# Altium PCB SmartSocket V1.0.PcbDoc (part 3 of 4)
Units mm, origin at the board's own origin, x right, y up, seen from the top; angles counter-clockwise.
Board outline 49.2 x 69.88 mm, 2 copper layers (Top Layer, Bottom Layer), stack 1.671 mm thick; 117 components, 80 nets, 371 pads, 48 vias.
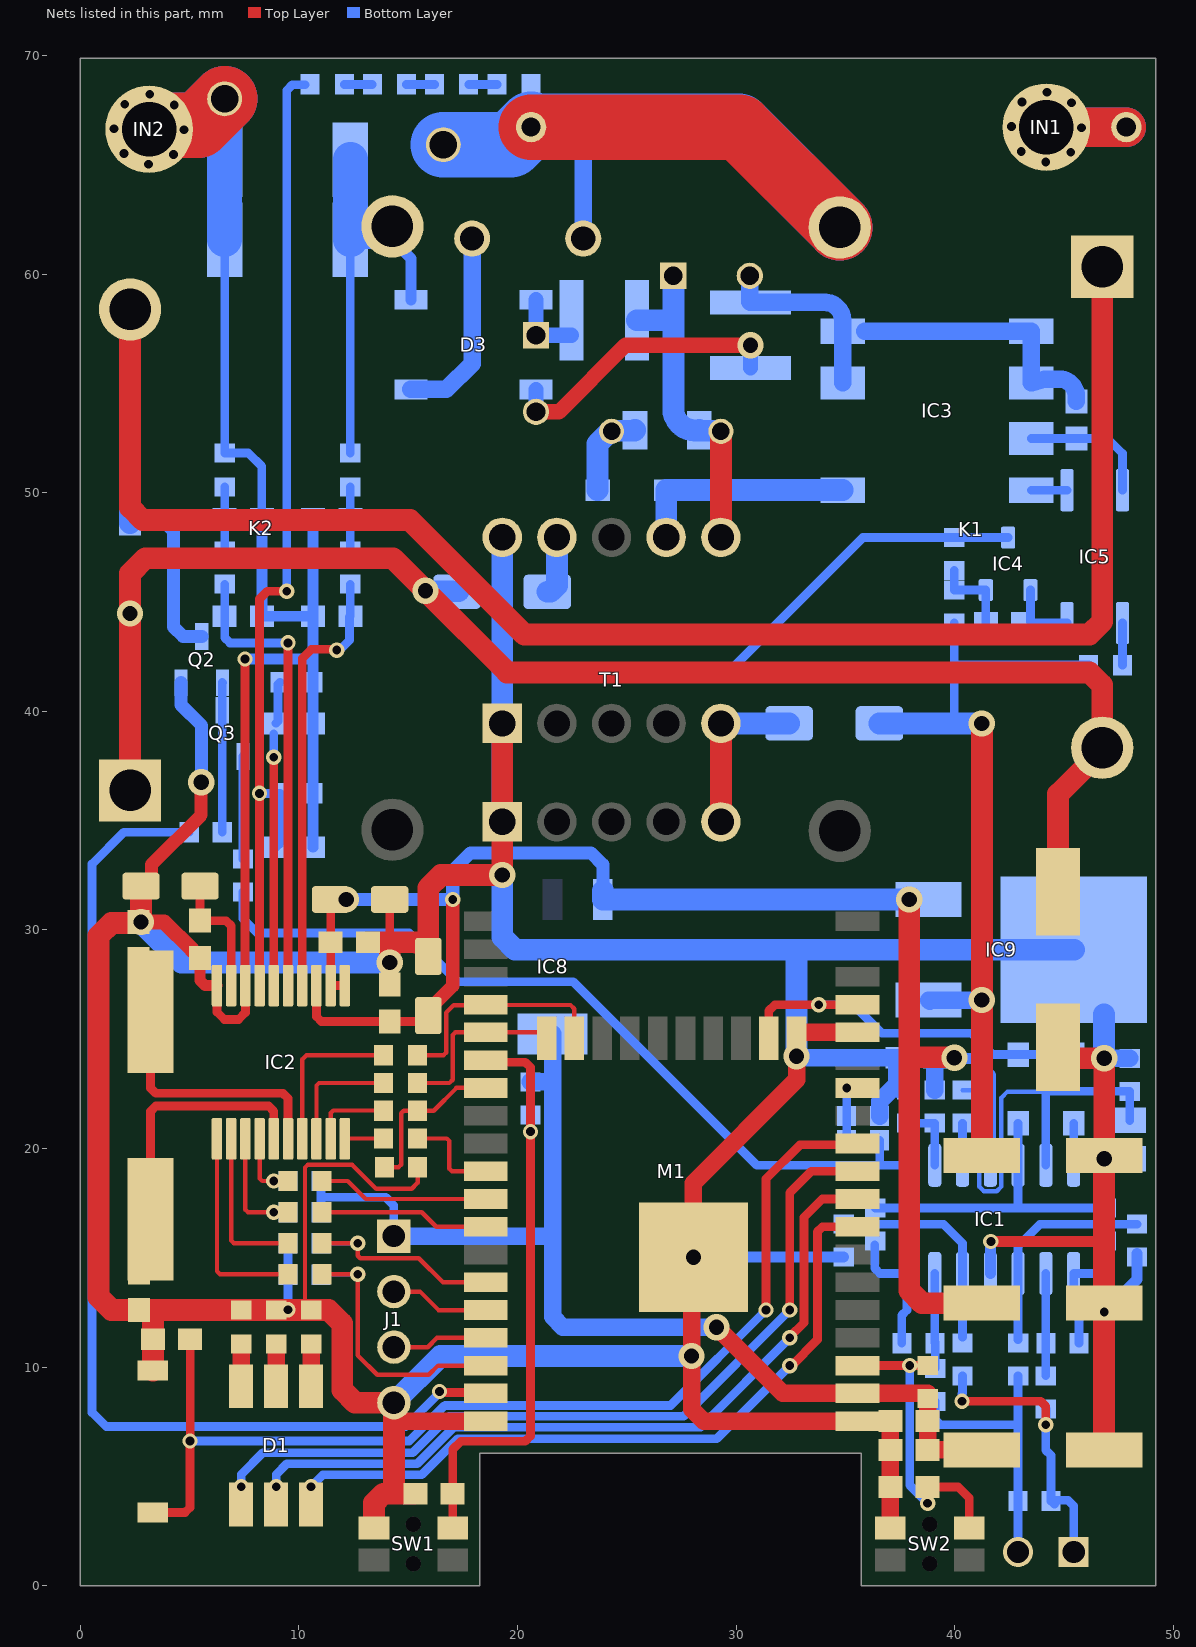
[diagram p2: the nets of this part, all layers, seen from the top]

## Part data (continued)
F2: library part "FUSE; 1A; 36911000000", "Fuse Subminiature Slow Blow Acting 1A 300V Radial 8.5 X 4 X 8mm Ammo Pack", Case/Package=Radial, Current=1A, DC Cold Resistance=71.5mR, Manufacturer="Littelfuse Wickmann", Manufacturer Part Number=36911000000, Max Operating Temperature=85°C, Min Operating Temperature=-40°C, Package Quantity=1400, Supplier Part Number=F5459CT-ND, Voltage Rating (AC)=300V, Blow Characteristic="TIME DELAY", Category=Fuses, ComponentLink1Description=https://datasheet.ciiva.com/7464/littelfuse-fuse-369-series-7464654.pdf?src-supplier=Digikey, ComponentLink1URL=https://datasheet.ciiva.com/7464/littelfuse-fuse-369-series-7464654.pdf?src-supplier=Digikey, ComponentLink2Description=https://datasheet.ciiva.com/16320/littelfuse-fuse-369-16320426.pdf?src-supplier=Future+Electronics, ComponentLink2URL=https://datasheet.ciiva.com/16320/littelfuse-fuse-369-16320426.pdf?src-supplier=Future+Electronics, ComponentLink3Description="Link Digikey", ComponentLink3URL=https://www.digikey.com/en/products/detail/littelfuse-inc/36911000000/1986930, Current Rating=1A, Designer=TVBac, Fuse Current=1A, Fuse Type="Board Mount (Cartridge Style Excluded)", Height=0.315inch, Lead Free="Lead Free", Lead Length=18.8mm, Length=0.335inch, Mounting Technology="Through Hole", Packaging="Cut Tape", Pricing="1=0.58, 5=0.482, 10=0.446, 50=0.3714, 100=0.3433, 250=0.30924, 500=0.28568, 1400=0.25378, 2800=0.23421, 4200=0.22341, 7000=0.218 (USD)", Reach SVHC Compliant=No, RoHS=Yes, RoHS Compliant=Yes, Series="TE5® 369", Size=8mm, Stock=1380, Supplier=Digikey, Termination=Radial, Width=0.157inch, Working Voltage=300V
IC1: library part "OPAM; SMD; LM324DR", "Quad 30-V 1.2-MHz operational amplifier 14-SOIC 0 to 70", Case/Package=SOIC, Input Bias Current=250nA, Input Offset Voltage (Vos)=7mV, Manufacturer="Texas Instruments", Manufacturer Part Number=LM324DR, Max Dual Supply Voltage=16V, Max Operating Temperature=70°C, Max Supply Voltage=32V, Min Dual Supply Voltage=1.5V, Min Operating Temperature=0°C, Min Supply Voltage=3V, Operating Supply Current=1.4mA, Output Current=30mA, Output Current per Channel=40mA, Package Quantity=2500, Supplier Part Number=296-14597-1-ND, Supply Current=3mA, Voltage Gain=100dB, Amplifier Type="GENERAL PURPOSE", Bandwidth=1.2MHz, Category="Amplifiers - Op Amps, Buffer, Instrumentation", Common Mode Rejection Ratio=65dB, ComponentLink1Description=https://datasheet.ciiva.com/34301/902590-34301708.pdf?src-supplier=Jameco, ComponentLink1URL=https://datasheet.ciiva.com/34301/902590-34301708.pdf?src-supplier=Jameco, ComponentLink2Description=https://datasheet.ciiva.com/1795/lm224-1795532.pdf?src-supplier=Digikey, ComponentLink2URL=https://datasheet.ciiva.com/1795/lm224-1795532.pdf?src-supplier=Digikey, ComponentLink3Description=https://datasheet.ciiva.com/1795/lm224-1795533.pdf?src-supplier=Digikey, ComponentLink3URL=https://datasheet.ciiva.com/1795/lm224-1795533.pdf?src-supplier=Digikey, ComponentLink4Description=https://datasheet.ciiva.com/1795/lm224-1795534.pdf?src-supplier=Digikey, ComponentLink4URL=https://datasheet.ciiva.com/1795/lm224-1795534.pdf?src-supplier=Digikey, ComponentLink5Description=https://datasheet.ciiva.com/5997/1768103-5997421.pdf?src-supplier=Farnell, ComponentLink5URL=https://datasheet.ciiva.com/5997/1768103-5997421.pdf?src-supplier=Farnell, ComponentLink6Description=https://datasheet.ciiva.com/2973/lm324ka-2973348.pdf?src-supplier=Avnet, ComponentLink6URL=https://datasheet.ciiva.com/2973/lm324ka-2973348.pdf?src-supplier=Avnet, ComponentLink7Description=https://datasheet.ciiva.com/7709/1840878-7709814.pdf?src-supplier=Element14, ComponentLink7URL=https://datasheet.ciiva.com/7709/1840878-7709814.pdf?src-supplier=Element14, ComponentLink8Description=https://datasheet.ciiva.com/46385/1877076-46385751.pdf?src-supplier=Element14, ComponentLink8URL=https://datasheet.ciiva.com/46385/1877076-46385751.pdf?src-supplier=Element14, ComponentLink9Description="Link Digikey", ComponentLink9URL=https://www.digikey.kr/en/products/detail/texas-instruments/LM324DR/555719, Designer=TVBac, Gain Bandwidth Product=1.2MHz, Lead Free="Lead Free", Mounting Technology="Surface Mount", Number of Amplifiers=4, Number of Channels=4, Number of Circuits=4, Number of Elements=4, Operating Supply Voltage=16V, Packaging="Tape and Reel", Pins=14, Pricing="1=0.23, 10=0.152, 25=0.132, 100=0.1105, 250=0.10008, 500=0.09382, 1000=0.08867, 2500=0.08322, 5000=0.07994, 7500=0.0783, 12500=0.07647, 17500=0.07541, 25000=0.07438, 62500=0.07218, 125000=0.07085 (USD)", Radiation Hardening=No, Reach SVHC Compliant=No, RoHS=Yes, RoHS Compliant=Yes, Series=-, Slew Rate=0.5V/µs, Stock=58799, Supplier=Digikey, Technology=BIPOLAR, Thickness=1.58mm, Unity Gain Bandwidth Product=1.2MHz
IC2: library part ADE7753ARSZ, "Single Phase Multifunction Metering IC 20-Pin SSOP Tube", Manufacturer="Analog Devices", Supplier Part Number=584-ADE7753ARSZ, Category="Analog to Digital Converters (ADCs)", ComponentLink1Description=https://datasheet.ciiva.com/15373/ade7753-249340-15373717.pdf?src-supplier=Mouser, ComponentLink1URL=https://datasheet.ciiva.com/15373/ade7753-249340-15373717.pdf?src-supplier=Mouser, ComponentLink2Description=https://datasheet.ciiva.com/1166/1610806-1166771.pdf?src-supplier=Element14, ComponentLink2URL=https://datasheet.ciiva.com/1166/1610806-1166771.pdf?src-supplier=Element14, ComponentLink3Description=https://datasheet.ciiva.com/15134/getdatasheetpartid-132040-15134272.pdf?src-supplier=Verical, ComponentLink3URL=https://datasheet.ciiva.com/15134/getdatasheetpartid-132040-15134272.pdf?src-supplier=Verical, ComponentLink4Description=https://datasheet.ciiva.com/1941/ade7753-1941429.pdf?src-supplier=Digikey, ComponentLink4URL=https://datasheet.ciiva.com/1941/ade7753-1941429.pdf?src-supplier=Digikey, ComponentLink5Description=https://datasheet.ciiva.com/22621/1610806-22621637.pdf?src-supplier=Element14, ComponentLink5URL=https://datasheet.ciiva.com/22621/1610806-22621637.pdf?src-supplier=Element14, ComponentLink6Description=https://datasheet.ciiva.com/3148/ade7753-3148700.pdf?src-supplier=Avnet, ComponentLink6URL=https://datasheet.ciiva.com/3148/ade7753-3148700.pdf?src-supplier=Avnet, ComponentLink7Description=https://datasheet.ciiva.com/1168/1610806-1168083.pdf?src-supplier=Element14, ComponentLink7URL=https://datasheet.ciiva.com/1168/1610806-1168083.pdf?src-supplier=Element14, ComponentLink8Description=https://datasheet.ciiva.com/5697/ade7753-5697029.pdf?src-supplier=Farnell, ComponentLink8URL=https://datasheet.ciiva.com/5697/ade7753-5697029.pdf?src-supplier=Farnell, ComponentLink9Description=https://datasheet.ciiva.com/48694/001249930-da-01-en-ic-energy-meteri-ade7753arsz-ssop-20-adi-48694326.pdf?src-supplier=Conrad, ComponentLink9URL=https://datasheet.ciiva.com/48694/001249930-da-01-en-ic-energy-meteri-ade7753arsz-ssop-20-adi-48694326.pdf?src-supplier=Conrad, ComponentLink10Description="Link Digikey", ComponentLink10URL=https://www.digikey.com/en/products/detail/analog-devices-inc/ADE7753ARSZ/671181, Designer=TVBac, Manufacturer Part Number=ADE7753ARSZ, Pricing="1=7.3, 10=5.71, 50=5.04, 100=3.91, 1000=3.51, 10000=3.37 (USD)", RoHS=Yes, Stock=239, Supplier=Mouser
IC3: library part LNK364GN-TL, "AC to DC Switching Converter Off-Line Switcher 140kHz 7-Pin SMD-B / IC OFFLINE SWIT HV 8SMD", Manufacturer="Power Integrations", Supplier Part Number=596-1089-1-ND, Category="Voltage Regulators - Switching", ComponentLink1Description=https://datasheet.ciiva.com/1930/lnk362-364-1930587.pdf?src-supplier=Digikey, ComponentLink1URL=https://datasheet.ciiva.com/1930/lnk362-364-1930587.pdf?src-supplier=Digikey, ComponentLink2Description=https://datasheet.ciiva.com/1930/lnk362-364-1930588.pdf?src-supplier=Digikey, ComponentLink2URL=https://datasheet.ciiva.com/1930/lnk362-364-1930588.pdf?src-supplier=Digikey, ComponentLink3Description=https://datasheet.ciiva.com/1930/lnk362-364-1930589.pdf?src-supplier=Digikey, ComponentLink3URL=https://datasheet.ciiva.com/1930/lnk362-364-1930589.pdf?src-supplier=Digikey, ComponentLink4Description=https://datasheet.ciiva.com/12230/lnk362-364-3310-12230262.pdf?src-supplier=Mouser, ComponentLink4URL=https://datasheet.ciiva.com/12230/lnk362-364-3310-12230262.pdf?src-supplier=Mouser, ComponentLink5Description="Link Digikey", ComponentLink5URL=https://www.digikey.com/en/products/detail/power-integrations/LNK364GN-TL/1007182, Designer=TVBac, Manufacturer Part Number=LNK364GN-TL, Pricing="1=0.87, 100=0.7168 (USD)", RoHS=Yes, Stock=726, Supplier=Digikey
IC4: library part TL431AIDBZR, "V-Ref Adjustable 2.495V to 36V 100mA Automotive 3-Pin SOT-23 T/R", Case/Package=SOT-23, Cathode Current=700uA, Manufacturer="Texas Instruments", Max Operating Temperature=125°C, Max Output current=100mA, Max Output Voltage=36V, Max Supply Voltage=37V, Min Input Voltage=2.495V, Min Operating Temperature=-40°C, Package Quantity=1, Supplier Part Number=595-TL431AIDBZR, Temperature Coefficient=92ppm/°C, Tolerance=1%, Category="Voltage References", ComponentLink1Description=https://datasheet.ciiva.com/3235/tl432b-3235600.pdf?src-supplier=Avnet, ComponentLink1URL=https://datasheet.ciiva.com/3235/tl432b-3235600.pdf?src-supplier=Avnet, ComponentLink2Description=https://datasheet.ciiva.com/15148/getdatasheetpartid-171576-15148968.pdf?src-supplier=Verical, ComponentLink2URL=https://datasheet.ciiva.com/15148/getdatasheetpartid-171576-15148968.pdf?src-supplier=Verical, ComponentLink3Description=https://datasheet.ciiva.com/41462/001014548-da-01-en-ic-vref-shunt-prec-tl431aidbzr-sot-3-tid-41462400.pdf?src-supplier=Conrad, ComponentLink3URL=https://datasheet.ciiva.com/41462/001014548-da-01-en-ic-vref-shunt-prec-tl431aidbzr-sot-3-tid-41462400.pdf?src-supplier=Conrad, ComponentLink4Description=https://datasheet.ciiva.com/46397/1887475-46397705.pdf?src-supplier=Element14, ComponentLink4URL=https://datasheet.ciiva.com/46397/1887475-46397705.pdf?src-supplier=Element14, ComponentLink5Description=https://datasheet.ciiva.com/2006/tl431a-2006188.pdf?src-supplier=Digikey, ComponentLink5URL=https://datasheet.ciiva.com/2006/tl431a-2006188.pdf?src-supplier=Digikey, ComponentLink6Description=https://datasheet.ciiva.com/2006/tl431a-2006187.pdf?src-supplier=Digikey, ComponentLink6URL=https://datasheet.ciiva.com/2006/tl431a-2006187.pdf?src-supplier=Digikey, ComponentLink7Description=https://datasheet.ciiva.com/2006/tl431a-2006189.pdf?src-supplier=Digikey, ComponentLink7URL=https://datasheet.ciiva.com/2006/tl431a-2006189.pdf?src-supplier=Digikey, ComponentLink8Description="Link Digikey", ComponentLink8URL=https://www.digikey.com/en/products/detail/texas-instruments/TL431AIDBZR/686856, Designer=TVBac, Lead Free="Lead Free", Manufacturer Part Number=TL431AIDBZR, Min Output Voltage=2.495V, Number of Channels=1, Output Current=100mA, Output Type=Adjustable, Output Voltage=36V, Packaging="Tape and Reel", Pins=3, Pricing="1=0.25, 10=0.142, 50=0.142, 100=0.101, 1000=0.095, 10000=0.08 (USD)", Radiation Hardening=No, Reach SVHC Compliant=No, Reference Type=Shunt,Adjustable, Reference Voltage=36V, RoHS=Yes, RoHS Compliant=Yes, Series=-, Stock=734349, Supplier=Mouser
IC5: library part "ISO; 1CH; EL357N-G", "Transistor Output Optocoupler, 1-Element, 3750V Isolation", Manufacturer=Everlight, Manufacturer Part Number=EL357N-G, Supplier Part Number=1080-1037-ND, Category=Optocouplers, ComponentLink1Description=https://datasheet.ciiva.com/2086/201407061738295695-2086633.pdf?src-supplier=Digikey, ComponentLink1URL=https://datasheet.ciiva.com/2086/201407061738295695-2086633.pdf?src-supplier=Digikey, Pricing="1=0.7, 10=0.416, 100=0.2729, 500=0.2168, 1000=0.19958, 2000=0.18548, 5000=0.17066, 10000=0.16177, 25000=0.15242 (USD)", RoHS=Yes, Stock=137, Supplier=Digikey
IC8: library part "LDO; 3V3; 1A; SMD; AZ1117EH-3.3TRG1", "Linear Voltage Regulator IC 1 Output 1A SOT-223", Package="SOT-223 Diodes Inc.", Availability=Unavailable, ComponentLink1Description="Link Digikey", ComponentLink1URL=https://www.digikey.com/en/products/detail/diodes-incorporated/AZ1117EH-3-3TRG1/5001329, Designer=TVBac, MF="Diodes Inc.", MP=AZ1117EH-3.3TRG1, Price=None, SnapEDA_Link=https://www.snapeda.com/parts/AZ1117EH-3.3TRG1/Diodes%20Inc./view-part/482930/?ref=snap
IC9: library part "LDO; 5V; 1A; BA17805FP-E2", "Linear Voltage Regulator, Fixed, Positive Output, 7.5 V to 25 V, 5V, 1A, 3 Pins, TO-252 (DPAK)", Manufacturer=Rohm, Manufacturer Part Number=BA17805FP-E2, Supplier Part Number=755-BA17805FP-E2, Category="Voltage Regulators - Linear", ComponentLink1Description=https://datasheet.ciiva.com/23912/1747296-23912291.pdf?src-supplier=Newark, ComponentLink1URL=https://datasheet.ciiva.com/23912/1747296-23912291.pdf?src-supplier=Newark, ComponentLink2Description=https://datasheet.ciiva.com/26878/getdatasheetpartid-477305-26878653.pdf?src-supplier=Verical, ComponentLink2URL=https://datasheet.ciiva.com/26878/getdatasheetpartid-477305-26878653.pdf?src-supplier=Verical, ComponentLink3Description=https://datasheet.ciiva.com/22732/1747296-22732780.pdf?src-supplier=Element14, ComponentLink3URL=https://datasheet.ciiva.com/22732/1747296-22732780.pdf?src-supplier=Element14, ComponentLink4Description=https://datasheet.ciiva.com/6594/ba178-series-j-6594060.pdf?src-supplier=Digikey, ComponentLink4URL=https://datasheet.ciiva.com/6594/ba178-series-j-6594060.pdf?src-supplier=Digikey, ComponentLink5Description=https://datasheet.ciiva.com/6594/ba178-series-j-6594061.pdf?src-supplier=Digikey, ComponentLink5URL=https://datasheet.ciiva.com/6594/ba178-series-j-6594061.pdf?src-supplier=Digikey, ComponentLink6Description=https://datasheet.ciiva.com/6594/ba178-series-j-6594062.pdf?src-supplier=Digikey, ComponentLink6URL=https://datasheet.ciiva.com/6594/ba178-series-j-6594062.pdf?src-supplier=Digikey, ComponentLink7Description="Link Digikey", ComponentLink7URL=https://www.digikey.com/en/products/detail/rohm-semiconductor/BA17805FP-E2/658261, Designer=TVBac, Lead Free=5697LeadFree, Number of Channels=1NUMBER, Pricing="1=0.82, 10=0.599, 50=0.599, 100=0.411, 1000=0.336, 10000=0.251 (USD)", RoHS=Yes, Stock=4846, Supplier=Mouser, Watchdog Timer=5511WatchdogTimer
IN1 IN2: library part INPUT-2.0x3.5, Designer=TVBac
J1: library part "HEADER; 4PIN; 2.54; VER; TSW-104-14-L-S", "Conn Unshrouded Header HDR 4 POS 2.54mm Solder ST Thru-Hole Automotive Bulk", Manufacturer=Samtec, Manufacturer Part Number=TSW-104-14-L-S, Supplier Part Number=SAM1055-04-ND, Category=Connectors, ComponentLink1Description=https://datasheet.ciiva.com/25618/0900766b81154476-25618487.pdf?src-supplier=Rs, ComponentLink1URL=https://datasheet.ciiva.com/25618/0900766b81154476-25618487.pdf?src-supplier=Rs, ComponentLink2Description=https://datasheet.ciiva.com/10190/htsw-th-10190703.pdf?src-supplier=Avnet, ComponentLink2URL=https://datasheet.ciiva.com/10190/htsw-th-10190703.pdf?src-supplier=Avnet, ComponentLink3Description="Link Digikey", ComponentLink3URL=https://www.digikey.com/en/products/detail/samtec-inc/TSW-104-14-L-S/1102620, Designer=TVBac, Pricing="1=0.43, 10=0.377, 100=0.3107, 500=0.2702, 1000=0.22291, 5000=0.19589, 10000=0.18238 (USD)", RoHS=Yes, Stock=1246, Supplier=Digikey
J6: library part "HEADER; 2PIN; 2.54; VER; TSW-101-15-T-D", "Headers & Wire Housings Classic PCB Header Strips, 0.100 pitch", Manufacturer=Samtec, Manufacturer Part Number=TSW-101-15-T-D, Category=Connectors, ComponentLink1Description=https://datasheet.ciiva.com/10283/htsw-th-10283318.pdf?src-supplier=Avnet, ComponentLink1URL=https://datasheet.ciiva.com/10283/htsw-th-10283318.pdf?src-supplier=Avnet, ComponentLink2Description="Link Digikey", ComponentLink2URL=https://www.digikey.com/en/products/detail/samtec-inc/TSW-101-15-T-D/7861723, Designer=TVBac, Pricing="1=0.18, 50=0.14, 100=0.12, 500=0.1, 1000=0.07, 2000=0.06, 5000=0.05 (USD)", RoHS=Yes, Stock=4464, Supplier="Arrow Electronics", Supplier Part Number=TSW-101-15-T-D
K1 K2: library part "RELAY; SINGLE; 20A; 12VDC; G4A-1A-E-DC12", "Electromechanical Relay 12VDC 160Ohm 20A SPST-NO (30.5x16x33.5)mm THT Power Relay", Manufacturer=Omron, Manufacturer Part Number=G4A-1A-E-DC12, Supplier Part Number="G4A-1A-E DC12", Category="Power Relays", ComponentLink1Description=https://datasheet.ciiva.com/22829/0900766b8002b917-22829163.pdf?src-supplier=Rs, ComponentLink1URL=https://datasheet.ciiva.com/22829/0900766b8002b917-22829163.pdf?src-supplier=Rs, ComponentLink2Description="Link Digikey", ComponentLink2URL=https://www.digikey.com/en/products/detail/omron-electronics-inc-emc-div/G4A-1A-E-DC12/202598, Designer=TVBac, Pricing="19=4.336 (USD)", RoHS=Yes, Stock=19, Supplier="Arrow Electronics"
L1 L2: library part "IND; 220uH; 250mA; ASPI-0418FS-221M-T3", "Power Inductor (SMD), 220 uH, ± 20%, 250 mA, Shielded, 330 mA, 4mm x 4mm x 1.8mm", Manufacturer=Abracon, Manufacturer Part Number=ASPI-0418FS-221M-T3, Supplier Part Number=815-ASPI0418FS221MT3, Category="Fixed Inductors", ComponentLink1Description=https://abracon.com/Magnetics/new/ASPI-0418FS.pdf?src-supplier=Digikey, ComponentLink1URL=https://abracon.com/Magnetics/new/ASPI-0418FS.pdf?src-supplier=Digikey, ComponentLink2Description="Link Digikey", ComponentLink2URL=https://www.digikey.com/en/products/detail/abracon-llc/ASPI-0418FS-221M-T3/10273501, Designer=TVBac, Pricing="1=0.36, 10=0.234, 50=0.234, 100=0.182, 1000=0.163, 10000=0.127 (USD)", RoHS=No, Stock=2874, Supplier=Mouser
M1: library part "ESP32-WROOM-WROVE-32E-H4; SMD;", "Rf Txrx Module Bt Trace Ant SMD", Manufacturer="Espressif Systems", Manufacturer Part Number=ESP32-WROOM-32E-H4, Supplier Part Number=1965-ESP32-WROOM-32E-H4CT-ND, Category=LDO, ComponentLink1Description="Link Datasheet", ComponentLink1URL=https://www.espressif.com/sites/default/files/documentation/esp32-wroom-32e_esp32-wroom-32ue_datasheet_en.pdf, ComponentLink2Description="Link Digikey", ComponentLink2URL=https://www.digikey.com/en/products/detail/espressif-systems/ESP32-WROOM-32E-H4/12696413, Designer=TVBac, Pricing="1=2.68 (USD)", RoHS=No, Stock=7552, Supplier=Digikey
Q2 Q3: library part "TRAN; NPN; 500mA;V;  BC817-25LT1G", "Single Bipolar Transistor, NPN, 45 V, 500 mA, 225 mW, SOT-23 (TO-236), 3 Pins, Surface Mount", Case/Package=SOT-23-3, Clock Frequency=100MHz, Collector Base Voltage (VCBO)=50V, Collector Emitter Breakdown Voltage=45V, Collector Emitter Saturation Voltage=700mV, Current Rating=500mA, Emitter Base Voltage (VEBO)=5V, Manufacturer="ON Semiconductor", Manufacturer Part Number=BC817-25LT1G, Max Operating Temperature=150°C, Max Power Dissipation=300mW, Min Operating Temperature=-55°C, Package Quantity=3000, Supplier Part Number=8062284, Category=BJTs, Collector Emitter Voltage (VCEO)=45V, Collector-emitter Voltage-Max=700mV, ComponentLink1Description=https://datasheet.ciiva.com/27748/2010413-27748829.pdf?src-supplier=Jameco, ComponentLink1URL=https://datasheet.ciiva.com/27748/2010413-27748829.pdf?src-supplier=Jameco, ComponentLink2Description=https://datasheet.ciiva.com/1196/bc817-16lt1-d-1196558.pdf?src-supplier=Element14, ComponentLink2URL=https://datasheet.ciiva.com/1196/bc817-16lt1-d-1196558.pdf?src-supplier=Element14, ComponentLink3Description=https://datasheet.ciiva.com/22641/bc817-16lt1-d-22641013.pdf?src-supplier=Farnell, ComponentLink3URL=https://datasheet.ciiva.com/22641/bc817-16lt1-d-22641013.pdf?src-supplier=Farnell, ComponentLink4Description=https://datasheet.ciiva.com/22664/bc817-16lt1-d-22664204.pdf?src-supplier=Element14, ComponentLink4URL=https://datasheet.ciiva.com/22664/bc817-16lt1-d-22664204.pdf?src-supplier=Element14, ComponentLink5Description=https://datasheet.ciiva.com/22664/1842041-22664101.pdf?src-supplier=Element14, ComponentLink5URL=https://datasheet.ciiva.com/22664/1842041-22664101.pdf?src-supplier=Element14, ComponentLink6Description="Link Digikey", ComponentLink6URL=https://www.digikey.com/en/products/detail/onsemi/BC817-25LT1G/918339, Contact Plating=Tin,Matte, Designer=TVBac, Frequency=100MHz, Gain Bandwidth Product=100MHz, Height=0.94mm, hFE Min=160, Lead Free="Lead Free", Length=2.9mm, Max Breakdown Voltage=45V, Max Collector Current=500mA, Number of Elements=1, Packaging="Tape and Reel", Pins=3, Polarity=NPN, Power Dissipation=300mW, Pricing="3000=0.0157, 12000=0.0151, 30000=0.0146, 75000=0.0142, 120000=0.0136 (USD)", Radiation Hardening=No, Reach SVHC Compliant=No, RoHS=Yes, RoHS Compliant=Yes, Series=-, Stock=1185000, Supplier="Future Electronics", Transition Frequency=100MHz, Width=1.3mm
R1 R3 R8 R20 R23 R24 R25 R28 R29 R39: library part "RES; 10K; 0603; SMD; ESR03EZPF1002", "SMD Chip Resistor, 10 kOhm, ± 1%, 250 mW, 0603 [1608 Metric], Thick Film, Anti-Surge", Case Code (Imperial)=0603, Case Code (Metric)=1608, Manufacturer=Rohm, Manufacturer Part Number=ESR03EZPF1002, Max Operating Temperature=155°C, Max Power Dissipation=250mW, Min Operating Temperature=-55°C, Package Quantity=1, Ratings=AEC-Q200, Supplier Part Number=RHM10KADCT-ND, Temperature Coefficient=100ppm/°C, Tolerance=1%, Voltage Rating (DC)=150V, Case/Package=0603, Category="Chip SMD Resistors", ComponentLink1Description=https://datasheet.ciiva.com/2469/esr-2469710.pdf?src-supplier=Digikey, ComponentLink1URL=https://datasheet.ciiva.com/2469/esr-2469710.pdf?src-supplier=Digikey, ComponentLink2Description=https://datasheet.ciiva.com/2469/esr-2469711.pdf?src-supplier=Digikey, ComponentLink2URL=https://datasheet.ciiva.com/2469/esr-2469711.pdf?src-supplier=Digikey, ComponentLink3Description=https://datasheet.ciiva.com/2469/esr-2469709.pdf?src-supplier=Digikey, ComponentLink3URL=https://datasheet.ciiva.com/2469/esr-2469709.pdf?src-supplier=Digikey, ComponentLink4Description="Link Digikey", ComponentLink4URL=https://www.digikey.com/en/products/detail/rohm-semiconductor/ESR03EZPF1002/1983429, Designer=TVBac, Features="Automotive AEC-Q200", Height=0.022inch, Lead Free=5697LeadFree, Length=0.063inch, Number of Terminations=2, Packaging="Cut Tape", Power Rating=250mW, Pricing="1=0.16, 10=0.078, 50=0.0516, 100=0.044, 500=0.03138, 1000=0.02764 (USD)", RoHS=Yes, RoHS Compliant=Yes, Series=ESR, Stock=2136779, Supplier=Digikey, Width=0.031inch
R4 R5 R6 R9 R11 R19 R21 R22 R27 R31 R32: library part "RES; 100R; 0603; SMD; KTR03EZPF1000", "Res Thick Film 0603 100 Ohm 1% 0.1W(1/10W) ±100ppm/C Pad SMD T/R Automotive AEC-Q200", Case Code (Imperial)=0603, Case Code (Metric)=1608, Manufacturer=Rohm, Manufacturer Part Number=KTR03EZPF1000, Max Operating Temperature=155°C, Max Power Dissipation=100mW, Min Operating Temperature=-55°C, Ratings=AEC-Q200, Supplier Part Number=755-KTR03EZPF1000, Temperature Coefficient=100ppm/°C, Tolerance=1%, Voltage Rating=350V, Case/Package=0603, Category="Chip SMD Resistors", ComponentLink1Description=https://datasheet.ciiva.com/14926/ktr-14926472.pdf?src-supplier=Digikey, ComponentLink1URL=https://datasheet.ciiva.com/14926/ktr-14926472.pdf?src-supplier=Digikey, ComponentLink2Description=https://datasheet.ciiva.com/14932/ktr-14932133.pdf?src-supplier=Digikey, ComponentLink2URL=https://datasheet.ciiva.com/14932/ktr-14932133.pdf?src-supplier=Digikey, ComponentLink3Description="Link Digikey", ComponentLink3URL=https://www.digikey.com/en/products/detail/rohm-semiconductor/KTR03EZPF1000/4051558, Designer=TVBac, Features="Automotive AEC-Q200", Number of Terminations=2, Packaging="Cut Tape", Pricing="1=0.12, 10=0.039, 50=0.039, 100=0.024, 1000=0.021, 10000=0.015 (USD)", RoHS=Yes, RoHS Compliant=Yes, Series=KTR, Stock=66325, Supplier=Mouser, Voltage Rating (DC)=350V
R7 R57: library part "RES; SHUNT; 10mOhm; SMD; WFMA2512R0100FEA", "Res Current Sense Metal Plate 2512 0.01 Ohm 1% 3W ±110ppm/°C Molded T/R", Manufacturer=Vishay, Manufacturer Part Number=WFMA2512R0100FEA, Power Rating=3W, Supplier Part Number=541-10292-6-ND, Temperature Coefficient=110ppm/°C, Category="Chip SMD Resistors", ComponentLink1Description=http://www.vishay.com/docs/30387/wfm.pdf?src-supplier=Digikey, ComponentLink1URL=http://www.vishay.com/docs/30387/wfm.pdf?src-supplier=Digikey, ComponentLink2Description=http://www.farnell.com/datasheets/2793367.pdf?src-supplier=Newark, ComponentLink2URL=http://www.farnell.com/datasheets/2793367.pdf?src-supplier=Newark, ComponentLink3Description="Link Digikey", ComponentLink3URL=https://www.digikey.com/en/products/detail/vishay-dale/WFMA2512R0100FEA/9992531, ComponentLink4Description="Link CXT", ComponentLink4URL=https://linhkien.cxt.vn/3121-wfma2512r0100fea-tro-001-ohms-1-3w.html, Designer=TVBac, Pricing="1=2.85, 10=1.682, 25=1.3844, 50=1.2026, 100=1.0506, 250=0.88712, 500=0.78654, 1000=0.70625 (USD)", RoHS=Yes, Supplier=Digikey
R10 R12 R13 R17 R35 R37 R38 R40 R42 R43 R46 R47 R49 R54 R55 R56 R58: library part "RES; 1K; 0603; SMD; ESR03EZPF1001", "SMD Chip Resistor, 1 kOhm, ± 1%, 250 mW, 0603 [1608 Metric], Thick Film, Anti-Surge", Manufacturer=Rohm, Manufacturer Part Number=ESR03EZPF1001, Supplier Part Number=RHM1.00KADCT-ND, Voltage Rating=150V, Category="Chip SMD Resistors", ComponentLink1Description=https://datasheet.ciiva.com/2469/esr-2469712.pdf?src-supplier=Digikey, ComponentLink1URL=https://datasheet.ciiva.com/2469/esr-2469712.pdf?src-supplier=Digikey, ComponentLink2Description=https://datasheet.ciiva.com/2469/esr-2469713.pdf?src-supplier=Digikey, ComponentLink2URL=https://datasheet.ciiva.com/2469/esr-2469713.pdf?src-supplier=Digikey, ComponentLink3Description=https://datasheet.ciiva.com/2469/esr-2469714.pdf?src-supplier=Digikey, ComponentLink3URL=https://datasheet.ciiva.com/2469/esr-2469714.pdf?src-supplier=Digikey, ComponentLink4Description="Link Digikey", ComponentLink4URL=https://www.digikey.com/en/products/detail/rohm-semiconductor/ESR03EZPF1001/1983428, Designer=TVBac, Lead Free=5697LeadFree, Pricing="1=0.11, 10=0.055, 50=0.0364, 100=0.0309, 500=0.02206, 1000=0.01943 (USD)", RoHS=Yes, Stock=2703233, Supplier=Digikey, Voltage Rating (DC)=150V
R14 R15 R16 R18: library part "RES; 300K; 0603; SMD; KTR03EZPF3003", "Res High Voltage Thick Film 0603 300k Ohm 1% 1/10W ±100ppm/°C Molded Paper T/R", Case Code (Imperial)=0603, Case Code (Metric)=1608, Manufacturer=Rohm, Manufacturer Part Number=KTR03EZPF3003, Max Operating Temperature=155°C, Max Power Dissipation=100mW, Min Operating Temperature=-55°C, Package Quantity=5000, Supplier Part Number=755-KTR03EZPF3003, Temperature Coefficient=100ppm/°C, Tolerance=1%, Voltage Rating=350V, Case/Package=0603, Category="Chip SMD Resistors", ComponentLink1Description=https://datasheet.ciiva.com/14926/ktr-14926439.pdf?src-supplier=Digikey, ComponentLink1URL=https://datasheet.ciiva.com/14926/ktr-14926439.pdf?src-supplier=Digikey, ComponentLink2Description=https://datasheet.ciiva.com/14925/ktr-14925709.pdf?src-supplier=Digikey, ComponentLink2URL=https://datasheet.ciiva.com/14925/ktr-14925709.pdf?src-supplier=Digikey, ComponentLink3Description="Link Digikey", ComponentLink3URL=https://www.digikey.com/en/products/detail/rohm-semiconductor/KTR03EZPF3003/4051625, Designer=TVBac, Features="Automotive AEC-Q200", Height=0.022inch, Length=0.063inch, Number of Terminations=2, Packaging="Cut Tape", Pricing="1=0.17, 10=0.055, 50=0.055, 100=0.032, 1000=0.026, 10000=0.019 (USD)", RoHS=Yes, RoHS Compliant=Yes, Series=KTR, Stock=9502, Supplier=Mouser, Voltage Rating (DC)=350V, Width=0.031inch
R26 R33 R34: library part "RES; 4.7K; 0603; SMD; SFR03EZPF4701", "Res Anti-Sulfured Thick Film 0603 4.7k Ohm 1% 1/10W ±100ppm/°C Molded Paper T/R", Manufacturer=Rohm, Manufacturer Part Number=SFR03EZPF4701, Power Rating=100mW, Supplier Part Number=755-SFR03EZPF4701, Voltage Rating (DC)=50V, Category="Chip SMD Resistors", ComponentLink1Description=http://www.farnell.com/datasheets/2611943.pdf?src-supplier=Farnell, ComponentLink1URL=http://www.farnell.com/datasheets/2611943.pdf?src-supplier=Farnell, ComponentLink2Description=http://www.farnell.com/datasheets/2611943.pdf?src-supplier=Newark, ComponentLink2URL=http://www.farnell.com/datasheets/2611943.pdf?src-supplier=Newark, ComponentLink3Description=http://www.farnell.com/datasheets/2611943.pdf?src-supplier=Element14, ComponentLink3URL=http://www.farnell.com/datasheets/2611943.pdf?src-supplier=Element14, ComponentLink4Description=https://www.rohm.com/datasheet/SFR03EZPF/sfr-e?src-supplier=Digikey, ComponentLink4URL=https://www.rohm.com/datasheet/SFR03EZPF/sfr-e?src-supplier=Digikey, ComponentLink5Description="Link Digikey", ComponentLink5URL=https://www.digikey.com/en/products/detail/rohm-semiconductor/SFR03EZPF4701/9771855, Designer=TVBac, Pricing="1=0.14, 10=0.045, 50=0.045, 100=0.027, 1000=0.02, 10000=0.014 (USD)", RoHS=Yes, Stock=30180, Supplier=Mouser
R30: library part "RES; 300K; 1206; ESR18EZPF3003", "Res Thick Film 1206 300K Ohm 1% 0.5W(1/2W) ±100ppm/C Epoxy Resin Pad SMD Automotive T/R", Case Code (Imperial)=1206, Case Code (Metric)=3216, Manufacturer=Rohm, Manufacturer Part Number=ESR18EZPF3003, Max Operating Temperature=155°C, Max Power Dissipation=500mW, Min Operating Temperature=-55°C, Ratings=AEC-Q200, Supplier Part Number=755-ESR18EZPF3003, Temperature Coefficient=100ppm/°C, Tolerance=1%, Voltage Rating=200V, Case/Package=1206, Category="Chip SMD Resistors", ComponentLink1Description=https://datasheet.ciiva.com/2527/esr-2527195.pdf?src-supplier=Digikey, ComponentLink1URL=https://datasheet.ciiva.com/2527/esr-2527195.pdf?src-supplier=Digikey, ComponentLink2Description=https://datasheet.ciiva.com/2527/esr-2527196.pdf?src-supplier=Digikey, ComponentLink2URL=https://datasheet.ciiva.com/2527/esr-2527196.pdf?src-supplier=Digikey, ComponentLink3Description=https://datasheet.ciiva.com/2527/esr-2527197.pdf?src-supplier=Digikey, ComponentLink3URL=https://datasheet.ciiva.com/2527/esr-2527197.pdf?src-supplier=Digikey, ComponentLink4Description="Link Digikey", ComponentLink4URL=https://www.digikey.com/en/products/detail/rohm-semiconductor/ESR18EZPF3003/1983605, Designer=TVBac, Features="Automotive AEC-Q200", Number of Terminations=2, Packaging="Cut Tape", Pricing="1=0.12, 10=0.042, 50=0.042, 100=0.026, 1000=0.023, 10000=0.016 (USD)", RoHS=Yes, RoHS Compliant=Yes, Series=ESR, Stock=34367, Supplier=Mouser
R36 R41 R44 R45 R48: library part "RES; 100K; 0603; SMD; ESR03EZPJ104", "Res Thick Film 0603 100K Ohm 5% 0.25W(1/4W) ±200ppm/C Pad SMD Automotive T/R", Manufacturer=Rohm, Manufacturer Part Number=ESR03EZPJ104, Supplier Part Number=RHM100KDCT-ND, Voltage Rating=150V, Category="Chip SMD Resistors", ComponentLink1Description=https://datasheet.ciiva.com/14924/esr-14924811.pdf?src-supplier=Digikey, ComponentLink1URL=https://datasheet.ciiva.com/14924/esr-14924811.pdf?src-supplier=Digikey, ComponentLink2Description=https://datasheet.ciiva.com/14928/esr-14928813.pdf?src-supplier=Digikey, ComponentLink2URL=https://datasheet.ciiva.com/14928/esr-14928813.pdf?src-supplier=Digikey, ComponentLink3Description=https://datasheet.ciiva.com/14930/esr-14930633.pdf?src-supplier=Digikey, ComponentLink3URL=https://datasheet.ciiva.com/14930/esr-14930633.pdf?src-supplier=Digikey, ComponentLink4Description="Link Digikey", ComponentLink4URL=https://www.digikey.com/en/products/detail/rohm-semiconductor/ESR03EZPJ104/4051180, Designer=TVBac, Lead Free=5697LeadFree, Pricing="1=0.1, 10=0.048, 50=0.0312, 100=0.0265, 500=0.0188, 1000=0.0165 (USD)", RoHS=Yes, Stock=165361, Supplier=Digikey, Voltage Rating (DC)=150V
SW1 SW2: library part "BUT; SW; SMD; EVQ-P7L01P", "Tactile Switch SPST-NO Side Actuated Surface Mount, Right Angle", Package=None, Check_prices=https://www.snapeda.com/parts/EVQ-P7L01P/Panasonic+Electronic+Components/view-part/?ref=eda, Digi-Key_Part_Number=P16769TR-ND, MF="Panasonic Electronic Components", MP=EVQ-P7L01P, Purchase-URL=https://pricing.snapeda.com/search/part/EVQ-P7L01P/?ref=eda, SnapEDA_Link=https://www.snapeda.com/parts/EVQ-P7L01P/Panasonic+Electronic+Components/view-part/?ref=snap
SW3: library part "BUT; SW; SMD; PTS636SM50JSMTRLFS", "Switch Tactile N.O. SPST Rectangular Button J-Bend 0.05A 12VDC 1.77N SMD T/R", Contact Resistance=100mR, Manufacturer="ITT C&K", Manufacturer Part Number=PTS636SM50JSMTRLFS, Supplier Part Number=CKN12319-1-ND, Category="Tactile Switches", ComponentLink1Description="Link Digikey", ComponentLink1URL=https://www.digikey.com/en/products/detail/c-k/PTS636-SM50J-SMTR-LFS/10071732, Number of Positions=2NUMBER, Pricing="1=0.21, 10=0.199, 25=0.1888, 100=0.1717, 250=0.1614, 500=0.14766 (USD)", RoHS=No, Stock=80725, Supplier=Digikey
T1: library part EE13/6/6-Power, "OFFLINE TRANSFORMER 6W EE13/7/6", Package=Package, Check_prices=https://www.snapeda.com/parts/EE13/6/6/Wurth+Electronics/view-part/?ref=eda, MF="Wurth Electronics Inc", MP=EE13/6/6, SnapEDA_Link=https://www.snapeda.com/parts/EE13/6/6/Wurth+Electronics/view-part/?ref=snap
VR1: library part "VAR; 470V; 100A; B72220S0301K101", "Epcos St&ard Series Metal Oxide Varistor 580pF 100A; Clamping 775V; Varistor 470V", Manufacturer="TDK EPCOS", Manufacturer Part Number=B72220S0301K101, Supplier Part Number=495-2406-ND, Category=Varistors, ComponentLink1Description=https://datasheet.ciiva.com/11834/0900766b80188ddb-11834361.pdf?src-supplier=Rs, ComponentLink1URL=https://datasheet.ciiva.com/11834/0900766b80188ddb-11834361.pdf?src-supplier=Rs, ComponentLink2Description=https://datasheet.ciiva.com/4540/siov-leaded-standard-4540645.pdf?src-supplier=Mouser, ComponentLink2URL=https://datasheet.ciiva.com/4540/siov-leaded-standard-4540645.pdf?src-supplier=Mouser, ComponentLink3Description=https://datasheet.ciiva.com/1278/1899727-1278204.pdf?src-supplier=Element14, ComponentLink3URL=https://datasheet.ciiva.com/1278/1899727-1278204.pdf?src-supplier=Element14, ComponentLink4Description="Link Digikey", ComponentLink4URL=https://www.digikey.com/en/products/detail/epcos-tdk-electronics/B72220S0301K101/651287, Designer=TVBac, Pricing="1=0.84, 10=0.737, 25=0.6924, 100=0.5652, 250=0.52496, 500=0.44676, 1000=0.35741, 2500=0.3239, 5000=0.31025 (USD)", RoHS=Yes, Stock=16323, Supplier=Digikey
X1: library part "OSC; 3.58M; 3.579545M; ABLS-3.579545MHZ-B2-T", "Crystal 3.579545MHz ±20ppm (Tol) ±50ppm (Stability) 18pF FUND 180Ohm 2-Pin HC-49/US SMD T/R", Manufacturer=Abracon, Manufacturer Part Number=ABLS-3.579545MHZ-B2-T, Supplier Part Number=535-9081-1-ND, Category=Crystals, ComponentLink1Description=https://datasheet.ciiva.com/15116/getdatasheetpartid-719903-15116782.pdf?src-supplier=Verical, ComponentLink1URL=https://datasheet.ciiva.com/15116/getdatasheetpartid-719903-15116782.pdf?src-supplier=Verical, ComponentLink2Description=https://datasheet.ciiva.com/16410/abls-16410837.pdf?src-supplier=Future+Electronics, ComponentLink2URL=https://datasheet.ciiva.com/16410/abls-16410837.pdf?src-supplier=Future+Electronics, ComponentLink3Description=https://datasheet.ciiva.com/854/abls-854273.pdf?src-supplier=Digikey, ComponentLink3URL=https://datasheet.ciiva.com/854/abls-854273.pdf?src-supplier=Digikey, ComponentLink4Description=https://datasheet.ciiva.com/854/abls-854274.pdf?src-supplier=Digikey, ComponentLink4URL=https://datasheet.ciiva.com/854/abls-854274.pdf?src-supplier=Digikey, ComponentLink5Description=https://datasheet.ciiva.com/854/abls-854275.pdf?src-supplier=Digikey, ComponentLink5URL=https://datasheet.ciiva.com/854/abls-854275.pdf?src-supplier=Digikey, ComponentLink6Description=https://datasheet.ciiva.com/4945/abls-44621-4945006.pdf?src-supplier=Mouser, ComponentLink6URL=https://datasheet.ciiva.com/4945/abls-44621-4945006.pdf?src-supplier=Mouser, ComponentLink7Description=https://datasheet.ciiva.com/7998/abls-7998431.pdf?src-supplier=Element14, ComponentLink7URL=https://datasheet.ciiva.com/7998/abls-7998431.pdf?src-supplier=Element14, ComponentLink8Description="Link Digikey", ComponentLink8URL=https://www.digikey.com/en/products/detail/abracon-llc/ABLS-3-579545MHZ-B2-T/675276, Designer=TVBac, Pricing="1=0.27, 10=0.231, 50=0.208, 100=0.1989, 500=0.17934, 1000=0.17152, 2000=0.16407, 3000=0.15987, 5000=0.15474, 7000=0.15146, 10000=0.14806, 25000=0.13969, 50000=0.13369 (USD)", RoHS=Yes, Stock=16401, Supplier=Digikey

## Via types
v1: diameter 0.7, hole 0.4, Top Layer to Bottom Layer, tented both sides, 30 vias
v2: diameter 1.2, hole 0.7, Top Layer to Bottom Layer, tented both sides, 18 vias

## Nets (pads, with @x,y where several pads share a name; then routed paths per layer and width w, separated by ;. In a path a pad name is that pad's centre, name@x,y a point inside that pad or via, vN(x,y) a via of type N, cw(c..) or ccw(c..) an arc to the next point about the centre after c; other vN are vias at no path point)
3V3-ESP: C7.1 C25.2 C28.2 IC8.4 J1.01 M1.2 R1.2 R3.2 R8.1 R20.1 | length 51.2
  Top Layer w0.8: v2(29.108,11.834) 32.138,8.804 M1.2@35.551,8.804 38.762,8.804 R3.2@38.762,8.564 C25.2@38.762,7.534 C28.2@38.762,6.223 C7.1@41.238,6.223
  Bottom Layer w0.4: R20.1@11.02,17.094 11.02,17.776 ; R8.1@11.02,18.517 11.02,17.776 ; J1.01@14.351,15.998 14.351,17.399 13.974,17.776 11.02,17.776
  Bottom Layer w0.8: J1.01@14.351,15.998 21.608,15.998 ; R1.2@20.599,23.056 21.608,23.056 ; IC8.4@21.608,25.244 21.608,23.056 ; v2(29.108,11.834) 22.076,11.834 21.608,12.303 21.608,15.998 ; 21.608,15.998 21.608,23.056
+5: C5.1 C6.1 C8.2 C9.2 C26.2 C27.1 IC1.4 IC2.1 IC2.2 IC2.3 IC8.3 IC9.3 R39.2 | length 78.4
  Top Layer w0.4: IC2.3@10.81,27.457 10.81,26.042 11.044,25.808 C9.2@14.16,25.808 15.646,25.808 C27.1@15.926,26.087 ; C6.1@11.46,31.394 C8.2@11.46,29.439 IC2.2@11.46,27.457 IC2.1@12.11,27.457
  Top Layer w0.6: C6.1@11.46,31.394 v2(12.167,31.394) ; C27.1@15.926,26.087 15.926,26.327 17.043,27.445 v1(17.043,31.394)
  Top Layer w1: 37.922,24.155 37.922,13.514 38.508,12.929 C5.1@41.238,12.929 ; v2(37.922,31.394) 37.922,24.181 v2@39.987,24.181
  Bottom Layer w0.5: v2(39.987,24.155) 40.013,24.129 40.87,24.129 41.631,23.368 IC1.4@41.631,19.239
  Bottom Layer w0.6: v2(12.167,31.394) v1@16.967,31.394 ; v1(17.043,31.394) 17.043,32.715 17.856,33.528 23.368,33.528 23.908,32.988 IC8.3@23.908,31.394
  Bottom Layer w0.8: R39.2@39.091,22.673 C26.2@39.091,24.155
  Bottom Layer w1: IC8.3@23.908,31.774 IC8.3@23.908,31.394 v2(37.922,31.394)
+12: C23.1 D5.K D6.1 K1.2 K2.1 | length 69.8
  Top Layer w1: K2.1@2.286,36.379 v2(2.286,44.475) 2.286,46.304 2.982,47 14.312,47 15.796,45.517 v2(15.799,45.517) ; v2@15.837,45.479 19.533,41.783 46.161,41.783 46.747,41.197 46.747,38.227 44.729,36.21 C23.1@44.729,31.744
  Bottom Layer w1: v2(2.286,44.475) D5.K@2.286,45.466 D5.K@2.286,45.466 ; v2(15.799,45.517) 15.824,45.491 D6.1@17.315,45.491
ADE-C\S\: M1.23 R22.2 | length 10.6
  Top Layer w0.2: R22.2@15.436,24.273 16.624,24.273 16.741,24.39 16.741,26.215 17.089,26.563 18.53,26.563 18.535,26.568 22.428,26.568 22.606,26.391 M1.23@22.606,25.044
ADE-CF: M1.36 R25.2 R34.2 | length 13.7
  Top Layer w0.2: R34.2@11.07,14.249 v1(12.698,14.249) ; v1@12.952,14.249 v1(12.698,14.249) ; M1.36@18.551,10.074 16.374,10.074 15.951,9.652 13.589,9.652 12.698,10.543 v1(12.698,14.249)
  Bottom Layer w0.2: R25.2@11.02,14.224 11.045,14.249 v1(12.698,14.249)
ADE-I\Q\R\: IC2.14 R8.2 R31.1 | length 3.8
  Top Layer w0.2: IC2.14@8.21,20.447 8.21,18.634 8.327,18.517 v1(8.86,18.517) R31.1@9.51,18.517
  Bottom Layer w0.2: v1@8.86,18.542 R8.2@9.51,18.542
ADE-MISO: M1.26 R23.2 R26.2 | length 7.5
  Top Layer w0.2: R23.2@13.926,19.152 14.564,19.152 14.681,19.269 14.681,21.616 14.798,21.733 16.17,21.733 17.212,22.774 M1.26@18.551,22.774
ADE-MOSI: M1.29 R19.2 | length 4.5
  Top Layer w0.2: R19.2@15.436,20.463 16.774,20.463 16.891,20.346 16.891,19.082 17.008,18.964 M1.29@18.551,18.964
ADE-S\A\G\: IC2.13 R20.2 R32.1 | length 5.8
  Top Layer w0.2: IC2.13@7.56,20.447 7.56,17.211 7.677,17.094 v1(8.86,17.094) R32.1@9.51,17.094
  Bottom Layer w0.2: v1(8.86,17.094) 8.936,17.018 R20.2@9.398,17.018
ADE-SCLK: M1.24 R21.2 | length 8.2
  Top Layer w0.2: R21.2@15.436,23.003 16.891,23.003 17.041,23.152 17.041,25.197 17.158,25.314 M1.24@18.551,25.314 21.066,25.314 M1.24@21.336,25.044
ADE-ZX: M1.33 R24.2 R33.2 | length 10.2
  Top Layer w0.2: R33.2@11.07,15.672 v1(12.7,15.672) 12.7,15.103 12.817,14.986 15.494,14.986 16.596,13.884 M1.33@18.551,13.884
  Bottom Layer w0.2: R24.2@11.02,15.672 v1(12.7,15.672)
CUR-SHT-1: D3.AC1 K2.3 R7.2 R9.1 R57.2 | length 19.2
  Bottom Layer w0.4: R9.1@12.358,51.816 R7.2@12.358,61.57
  Bottom Layer w0.5: K2.3@14.286,62.179 14.286,61.559 15.133,60.711 D3.AC1@15.133,58.819
  Bottom Layer w1.6: R7.2@12.358,61.57 R7.2@12.358,61.93 ; R57.2@12.358,65.227 R7.2@12.358,61.93 ; K2.3@14.286,62.179 13.948,62.179 13.709,61.94 12.368,61.94 R7.2@12.358,61.93
ESP-I\Q\R\: M1.30 R31.2 | length 7.8
  Top Layer w0.2: R31.2@11.07,18.517 12.243,18.517 13.065,17.694 M1.30@18.551,17.694
ESP-S\A\G\: M1.31 R32.2 | length 7.8
  Top Layer w0.2: R32.2@11.07,17.094 15.621,17.094 16.291,16.424 M1.31@18.551,16.424
LEAK: C20.2 D7.K D8.K IC1.6 M1.16 R42.1 R45.2 | length 40.8
  Top Layer w0.4: M1.16@31.471,25.07 M1.16@31.496,25.044 ; M1.16@31.496,25.07 31.496,26.301 31.779,26.584 v1(33.782,26.584) M1.16@35.551,26.584
  Bottom Layer w0.2: R42.1@40.361,22.673 41.013,22.673 41.131,22.556 41.131,18.259 41.336,18.054 41.926,18.054 42.139,18.267 42.139,22.327 42.418,22.606 44.171,22.606
  Bottom Layer w0.4: v1(33.782,26.584) 35.357,26.584 36.668,25.273 40.767,25.273 41.737,24.303 D7.K@42.901,24.303 44.171,24.303 ; IC1.6@44.171,19.239 44.171,22.606 ; D8.K@45.441,24.303 44.171,24.303 ; C20.2@48.006,21.29 R45.2@48.006,22.62 44.185,22.62 44.171,22.606 ; 44.171,22.606 44.171,24.303
LEAK_INT: M1.13 R54.2 R56.2 | length 2.4
  Bottom Layer w0.4: R54.2@35.059,20.382 R56.2@35.059,21.488 v1(35.059,22.774)
LED-B: D1.6 M1.8 | length 33.6
  Top Layer w0.4: D1.6@10.566,3.726 10.592,3.752 D1.6@10.592,4.54 ; v1(32.461,10.074) 32.542,10.074 33.722,11.254 33.722,16.19 33.956,16.424 M1.8@35.551,16.424
  Bottom Layer w0.4: v1(10.566,4.54) 11.107,5.08 15.621,5.08 17.272,6.731 29.118,6.731 v1(32.461,10.074)
LED-G: D1.4 M1.10 | length 38.4
  Top Layer w0.4: D1.4@7.366,3.726 v1(7.366,4.54) ; v1(32.461,12.614) 32.461,17.983 33.442,18.964 M1.10@35.551,18.964
  Bottom Layer w0.4: v1(7.366,4.54) 7.366,5.098 8.356,6.088 15.215,6.088 16.882,7.755 27.602,7.755 v1(32.461,12.614)
LED-R: D1.5 M1.9 | length 36.1
  Top Layer w0.4: D1.5@8.966,3.726 8.981,3.741 8.981,4.555 8.997,4.57 D1.5@8.997,4.54 ; v1(32.461,11.344) 32.461,11.388 33.111,12.038 33.111,16.855 33.95,17.694 M1.9@35.551,17.694
  Bottom Layer w0.4: v1(8.966,4.54) 8.966,5.098 9.456,5.588 15.422,5.588 17.089,7.255 28.372,7.255 v1(32.461,11.344)
NetC1_1: C1.1 D4.1 IC9.1 R27.2 R28.2 | length 37.7
  Top Layer w1: C1.1@41.244,19.685 v2(41.244,26.794) v2(41.244,39.446)
  Bottom Layer w0.4: 39.954,39.448 39.98,39.473 39.98,42.164 ; R28.2@39.98,44.034 39.98,42.164 ; R27.2@46.116,42.113 40.03,42.113 39.98,42.164
  Bottom Layer w0.8: IC9.1@38.853,26.745 IC9.1@38.803,26.794 v2(41.244,26.794)
  Bottom Layer w1: D4.1@36.558,39.448 39.954,39.448 v2@41.242,39.448
NetC2_1: C2.1 IC3.3 IC5.4 | length 6.1
  Bottom Layer w0.4: IC3.3@43.51,52.476 C2.1@45.568,52.476 46.99,52.476 47.676,51.791 IC5.4@47.676,50.114
NetC10_1: C10.1 IC2.15 X1.2 | length 12
  Top Layer w0.4: X1.2@3.226,16.764 3.226,21.711 3.46,21.946 8.626,21.946 8.86,21.711 IC2.15@8.86,20.447
NetC11_2: C11.2 R9.2 R10.1 | length 2.9
  Bottom Layer w0.4: R10.1@12.358,47.323 C11.2@12.358,48.793 R9.2@12.358,50.256
NetC12_2: C12.2 IC2.4 R10.2 | length 20.1
  Top Layer w0.4: IC2.4@10.16,27.457 10.16,42.417 10.585,42.842 11.692,42.842 v1(11.735,42.799)
  Bottom Layer w0.4: v1(11.735,42.799) 11.792,42.856 11.934,42.856 12.326,43.248 12.326,44.316 C12.2@12.358,44.348 R10.2@12.358,45.813
NetC13_2: C13.2 IC2.16 X1.1 | length 11.8
  Top Layer w0.4: X1.1@3.226,26.264 3.226,22.764 3.46,22.53 9.276,22.53 9.51,22.295 IC2.16@9.51,20.447
NetC14_2: C14.2 R11.2 R12.1 | length 2.9
  Bottom Layer w0.4: R12.1@6.612,47.323 C14.2@6.612,48.793 R11.2@6.612,50.256
NetC15_2: C15.2 IC2.5 R12.2 | length 21.2
  Top Layer w0.4: IC2.5@9.51,27.457 v1(9.51,43.129)
  Bottom Layer w0.4: R12.2@6.612,45.813 C15.2@6.612,44.348 6.62,44.339 6.62,43.364 6.855,43.129 v1@9.55,43.129
NetC16_2: C16.2 IC2.6 R13.2 | length 13.5
  Top Layer w0.4: IC2.6@8.86,27.457 v1(8.86,37.897)
  Bottom Layer w0.4: v1(8.86,37.897) C16.2@8.86,38.962 ; C16.2@8.958,39.448 9.053,39.543 9.053,41.231 R13.2@9.148,41.326
NetC17_1: C17.1 C18.2 IC2.9 | length 5.8
  Top Layer w0.4: C17.1@5.486,32.004 C18.2@5.486,30.425 6.676,30.425 6.91,30.191 IC2.9@6.91,27.457
NetC19_2: C19.2 IC2.7 R15.2 R17.2 | length 46.4
  Top Layer w0.4: IC2.7@8.21,27.457 v1(8.21,36.246) 8.21,45.142 8.56,45.491 v1(9.449,45.491)
  Bottom Layer w0.4: v1(8.21,36.246) R17.2@9.148,36.246 9.148,33.972 C19.2@8.958,33.782 ; v1(9.449,45.491) 9.449,68.392 9.709,68.652 R15.2@10.294,68.652
NetC21_2: C21.2 M1.25 R1.1 SW1.12 | length 27.3
  Top Layer w0.4: C21.2@16.954,4.216 17.04,4.13 SW1.12@17.04,2.641 ; C21.2@17.04,4.216 17.04,6.243 17.418,6.621 20.365,6.621 20.599,6.855 v1(20.599,20.777) 20.599,23.72 20.365,23.954 18.641,23.954 M1.25@18.551,24.044
  Bottom Layer w0.4: v1(20.599,20.777) R1.1@20.599,21.546
NetC22_1: C22.1 D2.K R30.1 | length 4.1
  Bottom Layer w1: D2.K@23.665,50.119 23.665,52.231 24.212,52.778 24.279,52.778 24.333,52.832 25.352,52.832 R30.1@25.377,52.857
NetC24_2: C24.2 M1.3 R3.1 SW2.12 | length 14.1
  Top Layer w0.2: v1(38.762,3.785) C24.2@38.762,4.521
  Top Layer w0.4: M1.3@35.551,10.074 35.556,10.079 37.943,10.079 v1(37.948,10.084) 37.952,10.079 38.757,10.079 R3.1@38.762,10.074 ; C24.2@38.762,4.521 40.157,4.521 40.662,4.017 SW2.12@40.662,2.641
  Bottom Layer w0.4: v1(37.948,10.084) 37.948,4.599 v1(38.762,3.785)
NetC29_2: C29.2 M1.11 SW3.1 | length 49.2
  Top Layer w0.4: SW3.1@3.327,3.354 4.793,3.354 5.027,3.588 v1(5.027,6.629) ; C29.2@5.027,11.278 5.041,11.266 v1@5.041,6.592 ; v1(31.369,12.614) 31.369,18.618 32.931,20.18 35.497,20.18 M1.11@35.551,20.234
  Bottom Layer w0.4: v1(5.027,6.629) 15.049,6.629 16.659,8.239 16.697,8.239 16.713,8.255 27.01,8.255 v1(31.369,12.614)
NetC32_1: C32.1 IC4.1 IC5.2 | length 3.1
  Bottom Layer w0.4: IC4.1@43.463,45.544 43.463,44.106 43.536,44.034 IC5.2@45.136,44.034
NetC32_2: C32.2 IC4.2 R28.1 R29.2 | length 3.8
  Bottom Layer w0.4: R29.2@39.98,46.434 R28.1@39.98,45.544 IC4.2@41.423,45.544 C32.2@41.423,44.034
NetD1_1: D1.1 R6.1 | length 1.9
  Top Layer w0.8: D1.1@10.566,9.126 R6.1@10.566,11.066
NetD1_2: D1.2 R5.1 | length 1.9
  Top Layer w0.8: D1.2@8.966,9.126 R5.1@8.966,11.066
NetD1_3: D1.3 R4.1 | length 1.9
  Top Layer w0.8: D1.3@7.366,9.126 R4.1@7.366,11.066
NetD2_A: D2.A IC3.5 T1.7 | length 10.2
  Bottom Layer w1: T1.7@26.808,47.958 D2.A@26.808,50.114 IC3.5@34.874,50.114
NetD3_AC2: D3.AC2 F2.2 | length 9
  Bottom Layer w0.8: D3.AC2@15.133,54.719 16.746,54.719 17.932,55.905 F2.2@17.932,61.62
NetD4_2: D4.2 T1.5 | length 12.1
  Top Layer w1: T1.5@29.308,34.948 T1.5@29.308,39.448
  Bottom Layer w1: T1.5@29.308,34.948 T1.5@29.308,39.448 D4.2@32.428,39.448
NetD5_A: D5.A K1.1 K2.2 Q2.3 | length 90.2
  Top Layer w1: K2.2@2.286,58.379 2.286,49.328 2.872,48.743 15.088,48.743 20.32,43.51 46.161,43.51 46.747,44.096 K1.1@46.747,60.328
  Bottom Layer w0.6: D5.A@2.286,48.606 3.916,48.606 4.267,48.255 4.267,43.866 4.706,43.427 Q2.3@5.563,43.427
  Bottom Layer w1: D5.A@2.286,48.606 K2.2@2.286,58.379
NetD6_2: D6.2 T1.9 | length 2.8
  Bottom Layer w1: D6.2@21.369,45.466 21.523,45.466 21.808,45.751 T1.9@21.808,47.958
NetD7_A: D7.A IC1.5 R37.2 R46.2 | length 14.4
  Bottom Layer w0.4: R37.2@36.373,17.287 42.926,17.287 ; D7.A@42.901,21.163 42.901,17.312 42.926,17.287 ; R46.2@46.914,17.287 42.926,17.287
NetD8_A: D8.A IC1.7 | length 1.9
  Bottom Layer w0.4: IC1.7@45.441,19.239 D8.A@45.441,21.163
NetF1_1: F1.1 IN1.1 | length 7.3
  Top Layer w1.8: IN1.1@44.196,66.718 F1.1@47.852,66.718
  Bottom Layer w1.8: IN1.1@44.196,66.718 F1.1@47.852,66.718
NetIC1_2: IC1.2 R38.2 R39.1 | length 3.2
  Bottom Layer w0.4: R38.2@37.821,21.163 R39.1@39.091,21.163 IC1.2@39.091,19.239
NetIC1_3: IC1.3 R42.2 | length 1.9
  Bottom Layer w0.4: IC1.3@40.361,19.239 R42.2@40.361,21.163
NetIC1_8: IC1.8 R44.2 R46.1 | length 6.3
  Bottom Layer w0.4: R44.2@45.681,11.1 45.681,12.374 45.441,12.614 IC1.8@45.441,14.289 46.679,14.289 46.914,14.523 R46.1@46.914,15.958
NetIC1_9: IC1.9 R43.2 R44.1 | length 4.7
  Bottom Layer w0.4: R43.2@44.171,9.608 R44.1@44.171,11.1 IC1.9@44.171,14.289
NetIC1_10: IC1.10 R47.2 R48.1 | length 10.1
  Bottom Layer w0.4: R47.2@42.901,11.252 IC1.10@42.901,14.289 42.901,15.545 43.9,16.544 R48.1@48.336,16.544
NetIC1_12: IC1.12 R40.2 R41.1 | length 10.1
  Bottom Layer w0.4: R41.1@34.925,16.544 39.488,16.544 40.361,15.672 IC1.12@40.361,14.289 R40.2@40.361,11.367
NetIC1_13: IC1.13 R35.2 R36.1 | length 4.3
  Bottom Layer w0.4: R36.1@39.091,11.13 IC1.13@39.091,14.289 ; R35.2@39.108,9.953 R36.1@39.108,11.13
NetIC1_14: IC1.14 R36.2 R37.1 | length 5.9
  Bottom Layer w0.4: R37.1@36.347,15.596 36.347,14.523 36.582,14.289 IC1.14@37.821,14.289 37.821,12.614 37.581,12.374 R36.2@37.581,11.1
NetIC2_11: IC2.11 R34.1 | length 9.4
  Top Layer w0.2: IC2.11@6.26,20.447 6.26,14.39 6.401,14.249 R34.1@9.51,14.249
NetIC2_12: IC2.12 R33.1 | length 7.3
  Top Layer w0.2: IC2.12@6.91,20.447 6.91,15.798 7.036,15.672 R33.1@9.51,15.672
NetIC2_17: IC2.17 R22.1 | length 7.4
  Top Layer w0.2: IC2.17@10.16,20.447 10.16,24.079 10.354,24.273 R22.1@13.876,24.273
NetIC2_18: IC2.18 R21.1 | length 5.6
  Top Layer w0.2: IC2.18@10.81,20.447 10.81,22.886 10.927,23.003 R21.1@13.876,23.003
NetIC2_19: IC2.19 R26.1 | length 3.6
  Top Layer w0.2: IC2.19@11.46,20.447 11.46,21.625 11.577,21.742 R26.1@13.876,21.742
NetIC2_20: IC2.20 R19.1 | length 1.8
  Top Layer w0.2: IC2.20@12.11,20.447 12.126,20.463 R19.1@13.876,20.463
NetIC3_4: IC3.4 IC5.3 | length 1.6